# Altium PCB VCO_Placa.PcbDoc
Units mm, origin at the board's own origin, x right, y up, seen from the top; angles counter-clockwise.
Board outline 100 x 100 mm, 2 copper layers (Top Layer, Bottom Layer); 50 components, 37 nets, 140 pads, 16 vias.
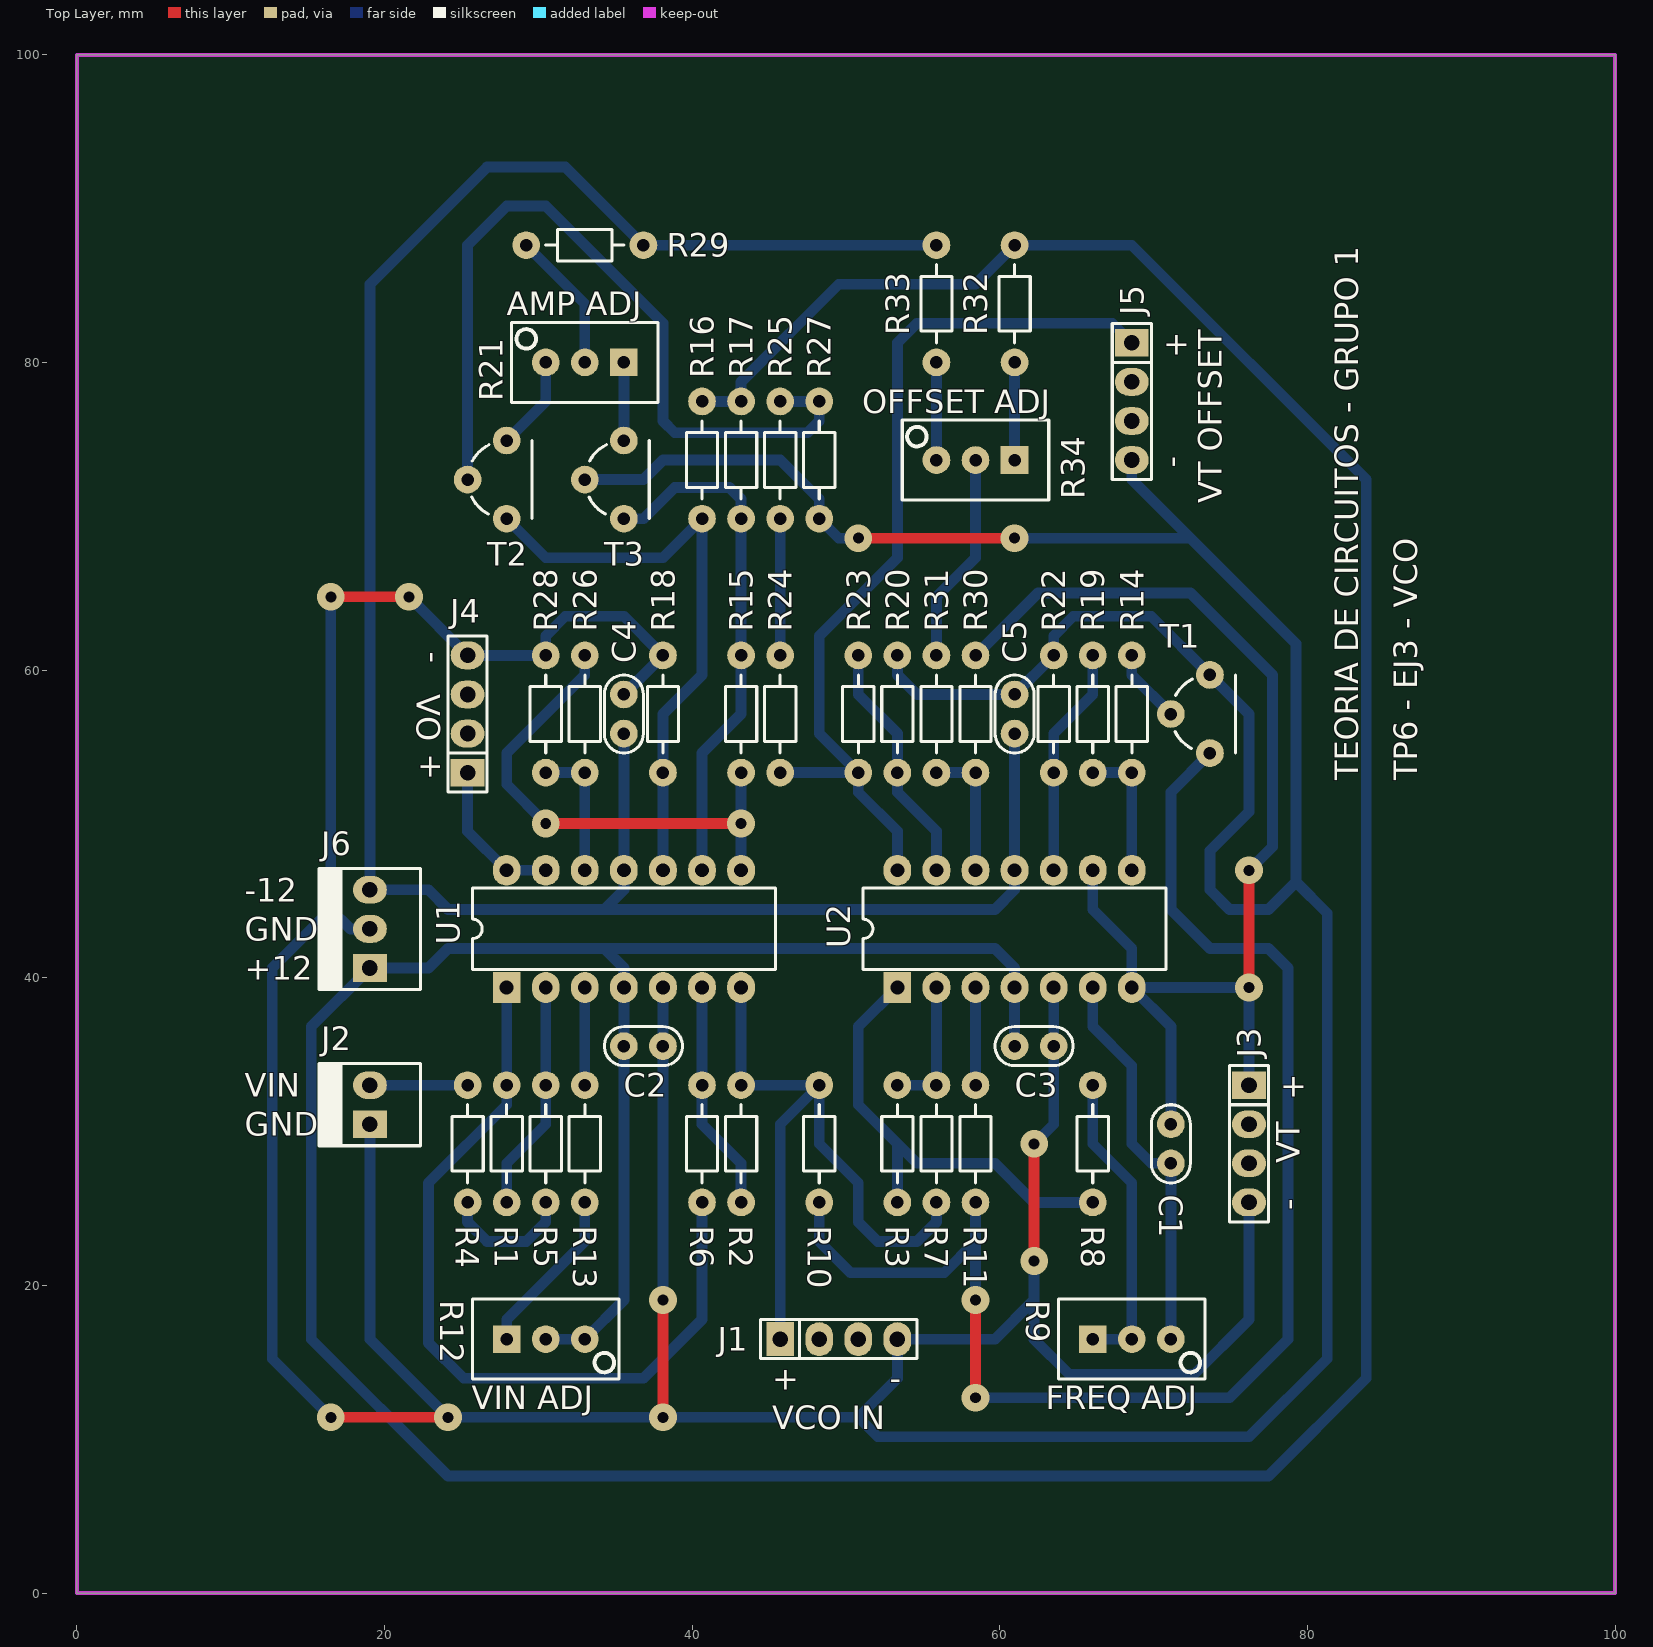
[diagram p0: Top Layer view]
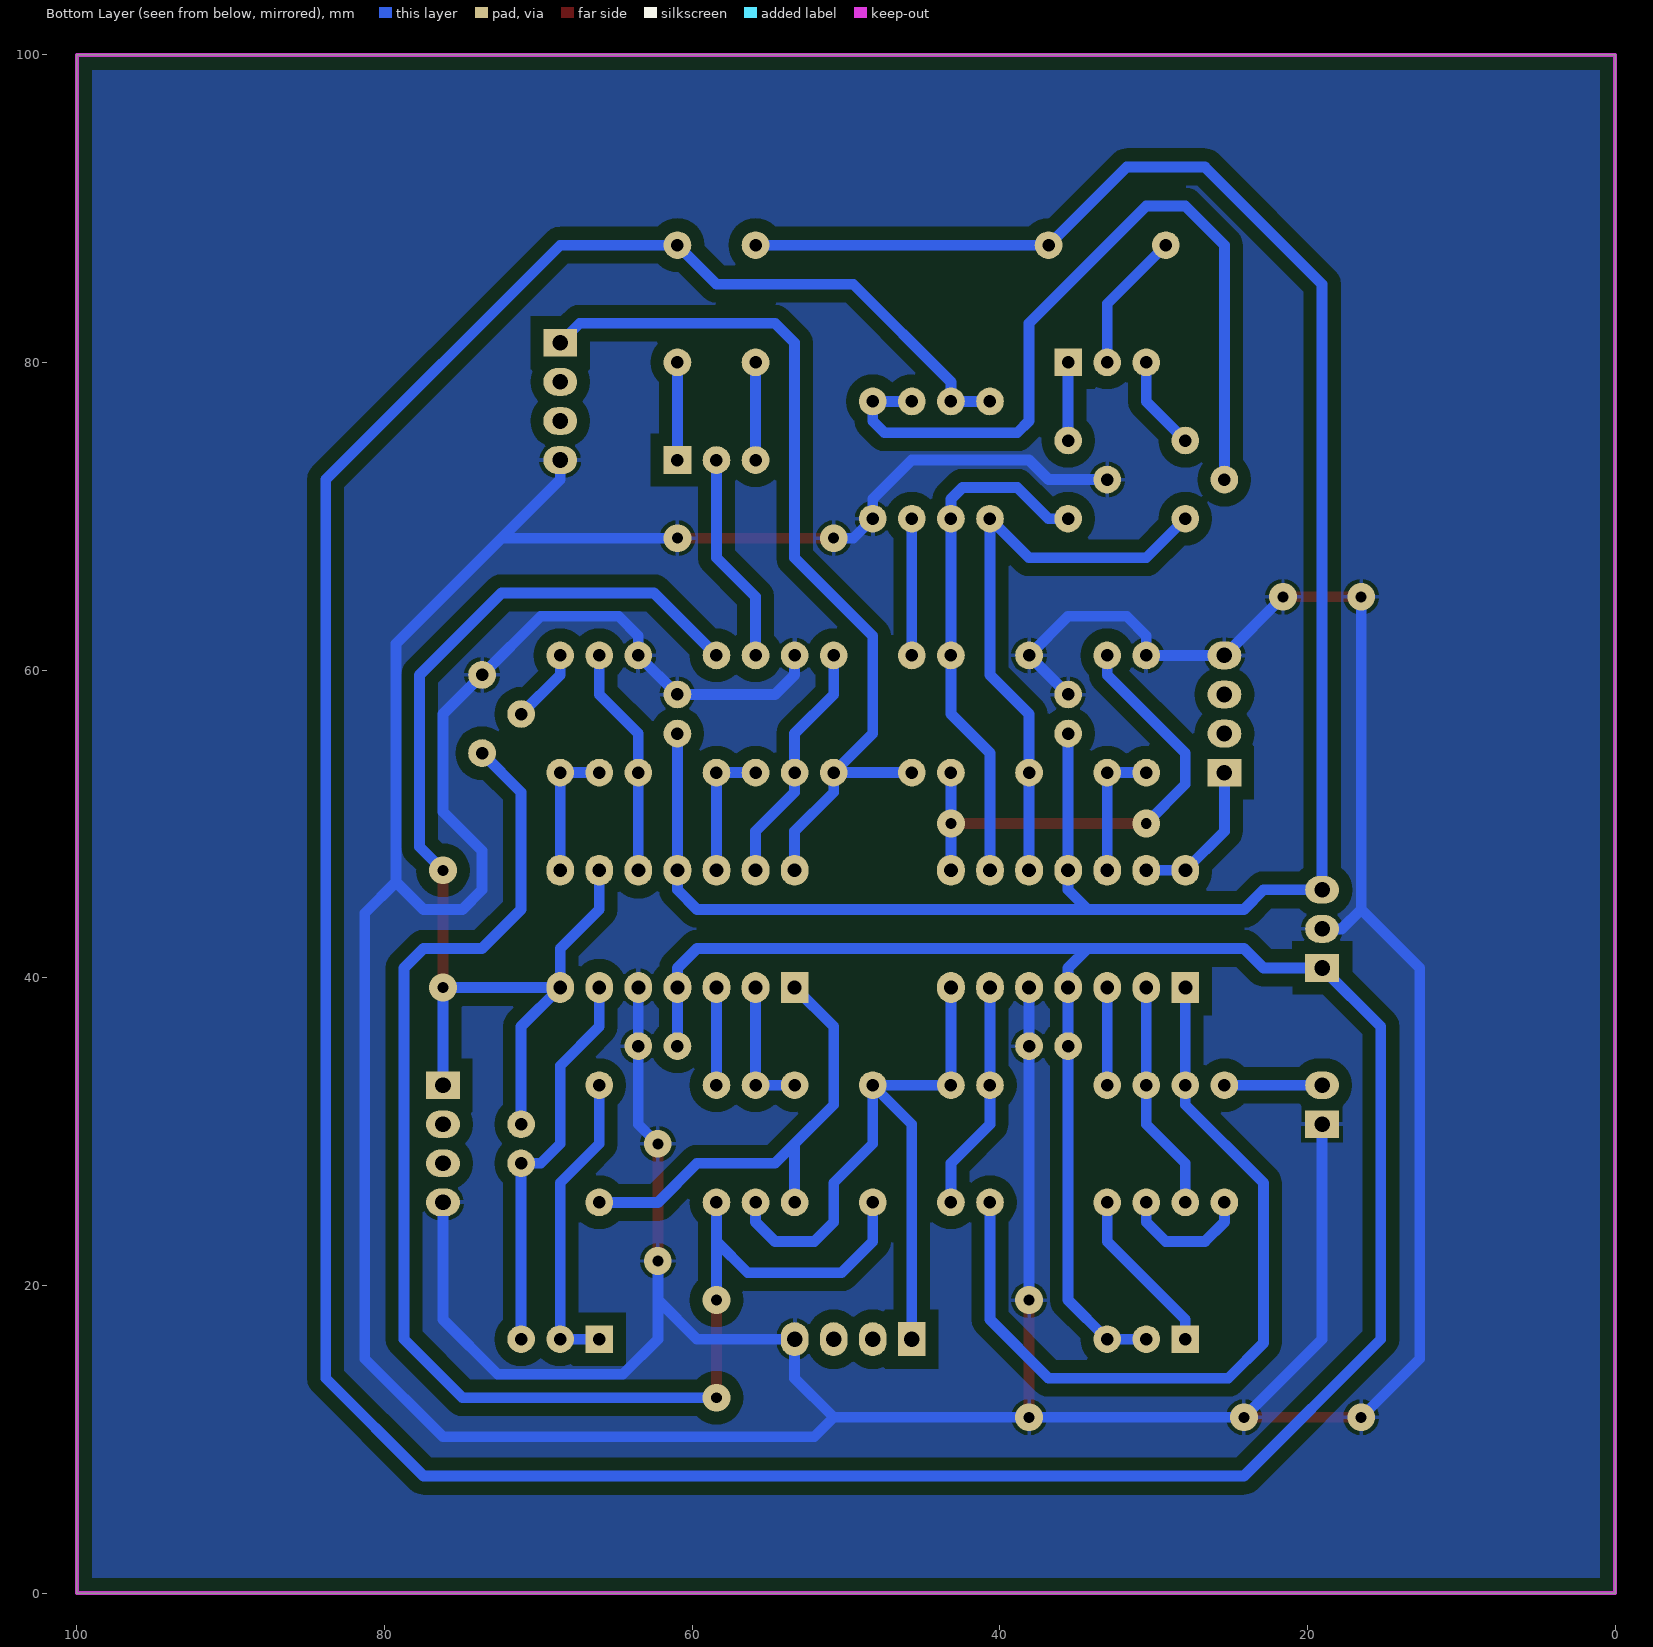
[diagram p1: Bottom Layer view, seen from below]
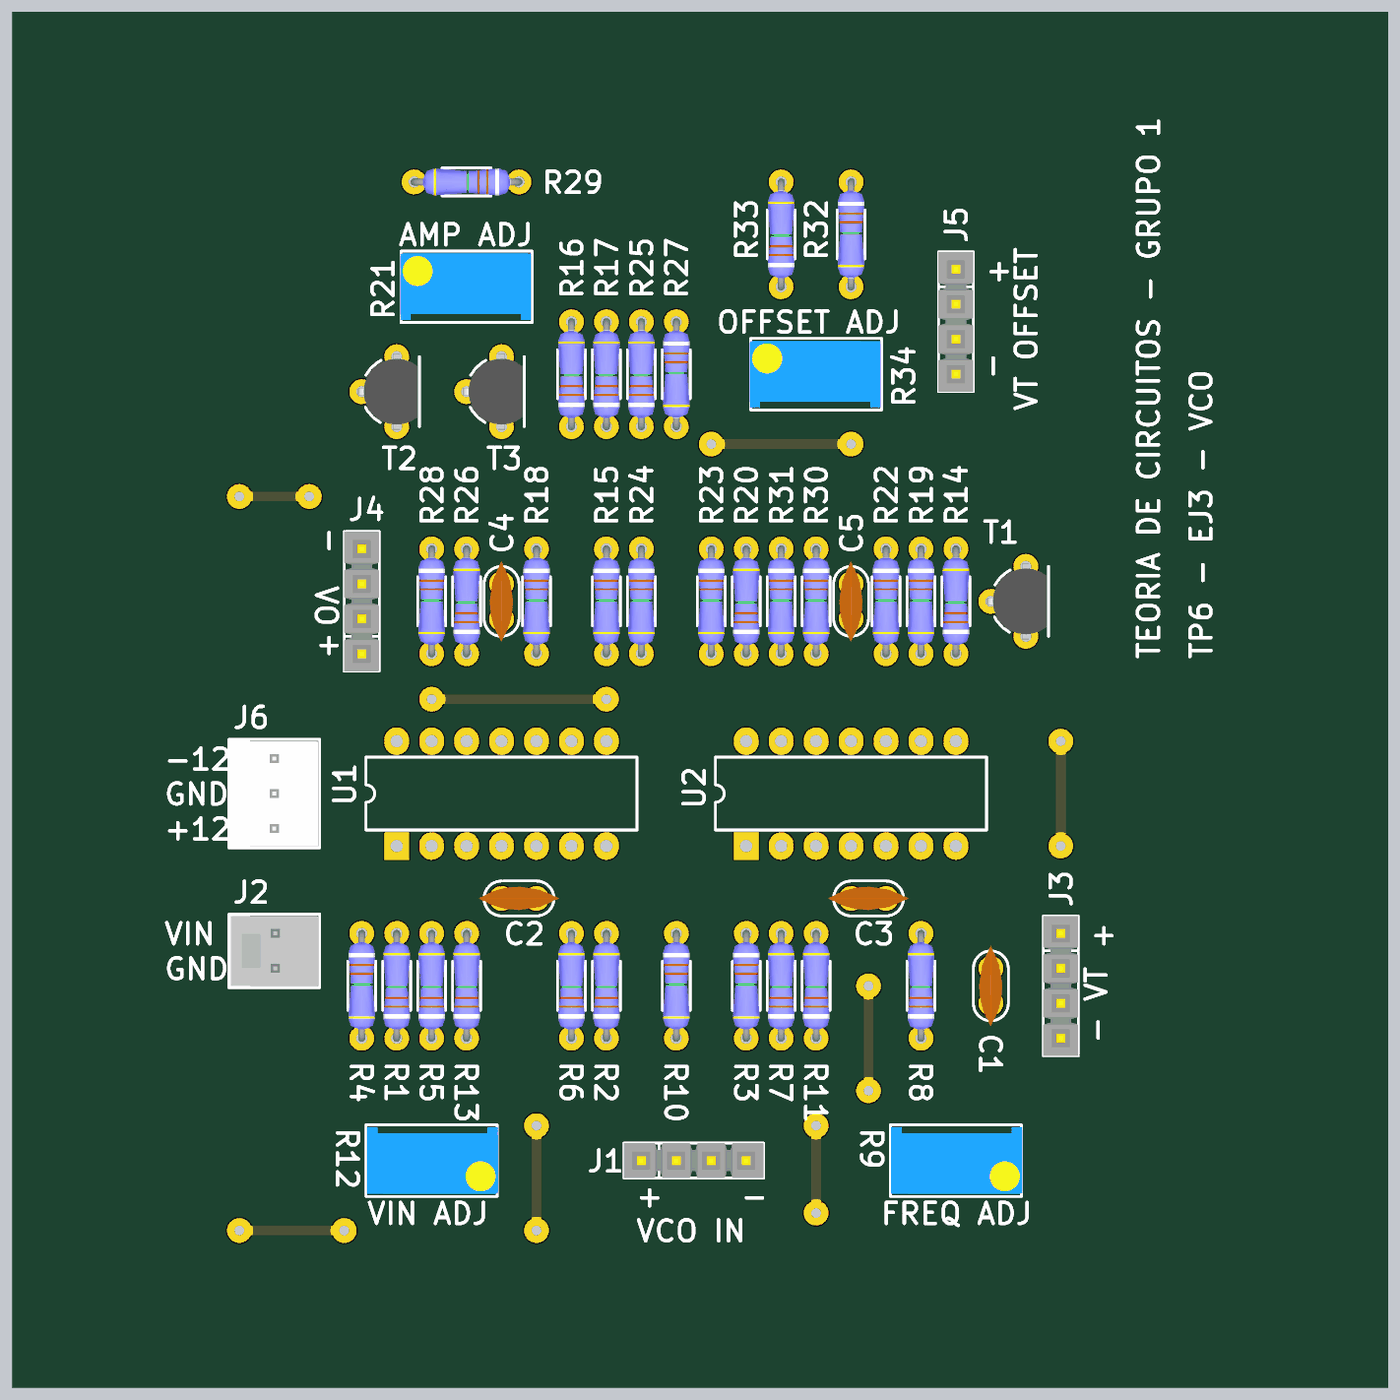
[diagram p2: 3D render of the assembled board from above, using the file's embedded part models]

## Layer stack, top to bottom
Top Solder: solder mask 0.0102, Solder Resist, Dk 3.5
Top Layer: signal copper 0.0356
Dielectric 1: dielectric 0.32, FR-4, Dk 4.8
Bottom Layer: signal copper 0.0356
Bottom Solder: solder mask 0.0102, Solder Resist, Dk 3.5

## Board outline
0,0 100,0 100,100 0,100

## Design rules (kind name [scope] priority, off if disabled: settings)
Clearance [All] p1: gap=0.7
PolygonConnect [All] p1: connectstyle=Relief reliefconductorwidth=0.254 reliefentries=4 polygonreliefangle="90 Angle" airgapwidth=0.254
RoutingVias [All] p1: holewidth=0.711 width=1.8 viastyle="Through Hole" minholewidth=0.711 minwidth=1.8 maxholewidth=0.711 maxwidth=1.8
SolderMaskExpansion [All] p1: expansion=0.102
Width [All] p1: maxlimit=0.7 minlimit=0.7 preferedwidth=0.7
30 further rules are at their usual default settings.

## Components (designator, comment, footprint, x,y, rotation, side; value= is the part's Value field where it differs from the comment)
C1 "10n" CAP100 71.12,29.21 r90 top
C2 "100n" CAP100 36.83,35.56 r0 top
C3 "100n" CAP100 62.23,35.56 r0 top
C4 "100n" CAP100 35.56,57.15 r90 top
C5 "100n" CAP100 60.96,57.15 r90 top
J1 "VIN" SIP4 49.53,16.51 r0 top
J2 "VIN" MOLEX2 19.05,30.48 r90 top
J3 "VT" SIP4 76.2,29.21 r270 top
J4 "VO" SIP4 25.4,57.15 r90 top
J5 "VT_OFFSET" SIP4 68.58,77.47 r270 top
J6 "FUENTE" MOLEX3 19.05,40.64 r90 top
R1 "1K8" RES300 27.94,25.4 r90 top
R2 "1K" RES300 43.18,25.4 r90 top
R3 "1K" RES300 53.34,33.02 r270 top
R4 "1K5" RES300 25.4,33.02 r270 top
R5 "1K" RES300 30.48,25.4 r90 top
R6 "1K" RES300 40.64,25.4 r90 top
R7 "1K" RES300 55.88,25.4 r90 top
R8 "1K8" RES300 66.04,25.4 r90 top
R9 "500" "PRESET V" 68.58,16.51 r0 top
R10 "1K" RES300 48.26,33.02 r270 top
R11 "1K" RES300 58.42,25.4 r90 top
R12 "10K" "PRESET V" 30.48,16.51 r0 top
R13 "47K" RES300 33.02,25.4 r90 top
R14 "2K2" RES300 68.58,53.34 r90 top
R15 "1K" RES300 43.18,60.96 r270 top
R16 "1K" RES300 40.64,69.85 r90 top
R17 "1K" RES300 43.18,69.85 r90 top
R18 "1K" RES300 38.1,60.96 r270 top
R19 "1K" RES300 66.04,60.96 r270 top
R20 "1K" RES300 53.34,53.34 r90 top
R21 "50" "PRESET V" 33.02,80.01 r180 top
R22 "1K" RES300 63.5,60.96 r270 top
R23 "1K" RES300 50.8,60.96 r270 top
R24 "22K" RES300 45.72,60.96 r270 top
R25 "22K" RES300 45.72,69.85 r90 top
R26 "1K" RES300 33.02,53.34 r90 top
R27 "1K" RES300 48.26,77.47 r270 top
R28 "1K" RES300 30.48,60.96 r270 top
R29 "5K6" RES300 36.83,87.63 r180 top
R30 "100K" RES300 58.42,60.96 r270 top
R31 "100K" RES300 55.88,60.96 r270 top
R32 "1K" RES300 60.96,87.63 r270 top
R33 "1K" RES300 55.88,80.01 r90 top
R34 "1K" "PRESET V" 58.42,73.66 r180 top
T1 "BC548B" TO92 72.39,57.15 r270 top
T2 "BC337" TO92 26.67,72.39 r270 top
T3 "BC337" TO92 34.29,72.39 r270 top
U1 "TL084ACN" 646-06 35.56,43.18 r0 top
U2 "TL084ACN" 646-06 60.96,43.18 r0 top

## Footprints (in the part's own frame and the unit in brackets; to place one, negate y for a bottom-side part, rotate by r counter-clockwise, add the part's x,y. Pads: shape width x height; smd on the part's side, far side on the other; paste and mask are expansions set on the pad)
646-06 [mm] "DIP; 14 Leads; Row Spacing 7.62 mm; Pitch 2.54 mm"
  rect 1.8x2 hole 0.9: 1(-7.62,-3.81)
  oval 1.8x2 hole 0.9: 2(-5.08,-3.81) 3(-2.54,-3.81) 4(0,-3.81) 5(2.54,-3.81) 6(5.08,-3.81) 7(7.62,-3.81) 8(7.62,3.81) 9(5.08,3.81) 10(2.54,3.81) 11(0,3.81) 12(-2.54,3.81) 13(-5.08,3.81) 14(-7.62,3.81)
  silkscreen extent -9.85,-2.65 9.85,2.65
CAP100 [mm]
  round 1.8 hole 0.813: 1(-1.27,0) 2(1.27,0)
  silkscreen extent -2.54,-1.27 2.54,1.27, body extent -2.92,-0.84 2.92,0.86, height 6.12
MOLEX2 [mm]
  rect 1.8x2.2 hole 1.016: 1(0,0)
  oval 1.8x2.2 hole 1.016: 2(2.54,0)
  silkscreen extent -1.4,-3.3 3.94,3.3, body extent -1.27,-3.17 3.81,3.18, height 10.74
MOLEX3 [mm]
  rect 1.8x2.2 hole 1.016: 1(0,0)
  oval 1.8x2.2 hole 1.016: 2(2.54,0) 3(5.08,0)
  silkscreen extent -1.4,-3.3 6.48,3.3, body extent -1.27,-3.17 6.35,3.18, height 10.74
"PRESET V" [mm]
  rect 1.8x1.8 hole 0.813: 1(-2.54,0)
  round 1.8 hole 0.813: 2(0,0) 3(2.54,0)
  silkscreen extent -4.76,-2.6 4.76,2.6, body extent -4.7,-2.42 4.83,2.42, height 11.55
RES300 [mm]
  round 1.8 hole 0.813: 1(0,0) 2(7.62,0)
  silkscreen extent 1.27,-1.02 6.35,1.02, body extent -0.25,-0.97 7.87,0.97, height 2.01
SIP4 [mm]
  rect 1.8x2.2 hole 1.016: 1(-3.81,0)
  oval 1.8x2.2 hole 1.016: 2(-1.27,0) 3(1.27,0) 4(3.81,0)
  silkscreen extent -5.08,-1.27 5.08,1.27, body extent -5.08,-1.27 5.08,1.27, height 8.38
TO92 [mm]
  round 1.8 hole 0.813: 1(0,-1.27) 2(2.54,1.27) 3(-2.54,1.27)
  silkscreen extent -2.54,-1 2.54,2.92, body extent -2.79,-1.55 2.79,2.79, height 8

## Part data
C1 C2 C3 C4 C5: library part CAP
J1 J3 J4 J5: library part CON4
J2: library part MOLEX2
J6: library part MOLEX3
R1 R2 R3 R4 R5 R6 R7 R8 R10 R11 R13 R14 R15 R16 R17 R18 R19 R20 R22 R23 R24 R25 R26 R27 R28 R29 R30 R31 R32 R33: library part RES
R9 R12 R21 R34: library part PRESET
T1 T2 T3: library part "TRANSISTOR NPN"
U1 U2: "JFET-Input Operational Amplifier"

## Via types
v1: diameter 1.8, hole 0.711, Top Layer to Bottom Layer, 16 vias

## Nets (pads, with @x,y where several pads share a name; then routed paths per layer and width w, separated by ;. In a path a pad name is that pad's centre, name@x,y a point inside that pad or via, vN(x,y) a via of type N, cw(c..) or ccw(c..) an arc to the next point about the centre after c; other vN are vias at no path point)
+12V: C2.1 C3.1 J6.1 R12.2 R12.3 R16.2 R17.2 R32.1 U1.4 U2.4 | length 291
  Bottom Layer w0.7: R12.2 R12.3 35.56,19.05 C2.1 U1.4 35.56,40.64 34.29,41.91 ; R16.2 R17.2 43.18,78.74 49.53,85.09 58.42,85.09 R32.1 68.58,87.63 83.82,72.39 83.82,13.97 77.47,7.62 24.13,7.62 15.24,16.51 15.24,36.83 J6.1 22.86,40.64 24.13,41.91 34.29,41.91 ; C3.1 U2.4 60.96,40.64 59.69,41.91 34.29,41.91
-12V: C4.1 C5.1 J6.3 R29.1 R33.2 U1.11 U2.11 | length 146.5
  Bottom Layer w0.7: C4.1 U1.11 35.56,45.72 34.29,44.45 ; R33.2 R29.1 31.75,92.71 26.67,92.71 19.05,85.09 J6.3 22.86,45.72 24.13,44.45 34.29,44.45 ; C5.1 U2.11 60.96,45.72 59.69,44.45 34.29,44.45
GND: C2.2 C3.2 C4.2 C5.2 J1.4 J2.1 J3.4 J4.4 J5.4 J6.2 R18.1 R20.2 R22.1 R27.2 R28.1 T1.3 T3.1 U1.5 U2.5 | length 425
  Top Layer w0.7: v1(16.51,11.43) v1(24.13,11.43) ; v1(16.51,64.77) v1(21.59,64.77) ; v1(38.1,11.43) v1(38.1,19.05) ; v1(50.8,68.58) v1(60.96,68.58) ; v1(62.23,21.59) v1(62.23,29.21)
  Bottom Layer w0.7: v1(16.51,11.43) 12.7,15.24 12.7,40.64 16.51,44.45 ; v1(16.51,64.77) 16.51,44.45 ; J2.1 19.05,16.51 v1(24.13,11.43) v1(38.1,11.43) 50.8,11.43 ; J6.2 17.78,43.18 16.51,44.45 ; v1(21.59,64.77) J4.4 R28.1 30.48,62.23 31.75,63.5 35.56,63.5 R18.1 C4.2 ; T3.1 36.83,72.39 38.1,73.66 45.72,73.66 48.26,71.12 R27.2 49.53,68.58 v1(50.8,68.58) ; v1(38.1,19.05) C2.2 U1.5 ; R20.2 53.34,59.69 54.61,58.42 C5.2 R22.1 63.5,62.23 64.77,63.5 69.85,63.5 T1.3 76.2,57.15 76.2,50.8 73.66,48.26 73.66,45.72 74.93,44.45 77.47,44.45 79.248,46.228 ; v1(60.96,68.58) 72.39,68.58 ; v1(62.23,21.59) 62.23,19.05 ; v1(62.23,29.21) 63.5,30.48 C3.2 U2.5 ; J5.4 68.58,72.39 72.39,68.58 ; J3.4 76.2,17.78 72.644,14.224 64.516,14.224 62.23,16.51 62.23,19.05 ; 50.8,11.43 52.07,10.16 76.2,10.16 81.28,15.24 81.28,44.196 79.248,46.228 ; 50.8,11.43 53.34,13.97 J1.4 59.69,16.51 62.23,19.05 ; 72.39,68.58 79.248,61.722 79.248,46.228
NetC1_1: C1.1 R9.3 U2.6 | length 25.7
  Bottom Layer w0.7: U2.6 66.04,36.83 68.58,34.29 68.58,29.21 69.85,27.94 C1.1 R9.3
NetJ1_1: J1.1 R2.2 R7.1 R10.1 U1.7 | length 46.3
  Bottom Layer w0.7: U1.7 R2.2 R10.1 ; J1.1 45.72,30.48 R10.1 ; R7.1 55.88,24.13 54.61,22.86 52.07,22.86 50.8,24.13 50.8,26.67 48.26,29.21 R10.1
NetJ2_2: J2.2 R4.1 | length 6.3
  Bottom Layer w0.7: J2.2 R4.1
NetJ4_1: J4.1 U1.13 U1.14 | length 9.9
  Bottom Layer w0.7: J4.1 25.4,49.53 U1.14 U1.13
NetJ5_1: J5.1 R23.2 R24.2 U2.14 | length 59.9
  Bottom Layer w0.7: R24.2 R23.2 ; U2.14 53.34,49.53 50.8,52.07 R23.2 ; J5.1 67.31,82.55 54.61,82.55 53.34,81.28 53.34,67.31 48.26,62.23 48.26,55.88 R23.2
NetR1_1: R1.1 R5.2 U1.2 | length 15
  Bottom Layer w0.7: R1.1 27.94,27.94 30.48,30.48 R5.2 U1.2
NetR1_2: R1.2 R6.1 U1.1 | length 53.1
  Bottom Layer w0.7: U1.1 R1.2 27.94,31.75 22.86,26.67 22.86,16.256 25.146,13.97 36.83,13.97 40.64,17.78 R6.1
NetR2_1: R2.1 R6.2 U1.6 | length 15
  Bottom Layer w0.7: U1.6 R6.2 40.64,30.48 43.18,27.94 R2.1
NetR3_1: R3.1 R7.2 U2.2 | length 8.9
  Bottom Layer w0.7: R3.1 R7.2 U2.2
NetR3_2: R3.2 R8.1 U2.1 | length 30.4
  Bottom Layer w0.7: R3.2 53.34,29.21 ; U2.1 50.8,36.83 50.8,31.75 53.34,29.21 ; R8.1 62.23,25.4 59.69,27.94 54.61,27.94 53.34,29.21
NetR4_2: R4.2 R5.1 | length 8.7
  Bottom Layer w0.7: R4.2 25.4,24.13 26.67,22.86 29.21,22.86 30.48,24.13 R5.1
NetR8_2: R8.2 R9.1 R9.2 | length 20.1
  Bottom Layer w0.7: R9.1 R9.2 68.58,26.67 66.04,29.21 R8.2
NetR10_2: R10.2 R11.1 T1.2 | length 93.5
  Top Layer w0.7: v1(58.42,12.7) v1(58.42,19.05)
  Bottom Layer w0.7: R10.2 48.26,22.86 50.292,20.828 56.388,20.828 58.42,22.86 ; v1(58.42,12.7) 74.93,12.7 78.74,16.51 78.74,40.64 77.47,41.91 73.66,41.91 71.12,44.45 71.12,52.07 T1.2 ; v1(58.42,19.05) 58.42,22.86 ; R11.1 58.42,22.86
NetR11_2: R11.2 U2.3 | length 6.3
  Bottom Layer w0.7: R11.2 U2.3
NetR12_1: R12.1 R13.1 | length 11
  Bottom Layer w0.7: R12.1 27.94,17.78 33.02,22.86 R13.1
NetR13_2: R13.2 U1.3 | length 6.3
  Bottom Layer w0.7: R13.2 U1.3
NetR14_1: R14.1 R19.2 U2.8 | length 8.9
  Bottom Layer w0.7: R19.2 R14.1 U2.8
NetR14_2: R14.2 T1.1 | length 4.9
  Bottom Layer w0.7: R14.2 68.58,59.69 T1.1
NetR15_1: R15.1 R17.1 T3.2 U1.9 | length 34
  Bottom Layer w0.7: T3.2 36.83,69.85 38.862,71.882 42.418,71.882 43.18,71.12 R17.1 R15.1 43.18,57.15 40.64,54.61 U1.9
NetR15_2: R15.2 R26.2 U1.8 | length 33.1
  Top Layer w0.7: v1(30.48,50.038) v1(43.18,50.038)
  Bottom Layer w0.7: v1(30.48,50.038) 27.94,52.578 27.94,54.61 33.02,59.69 R26.2 ; U1.8 v1(43.18,50.038) R15.2
NetR16_1: R16.1 R18.2 T2.2 U1.10 | length 38.7
  Bottom Layer w0.7: T2.2 30.48,67.31 38.1,67.31 R16.1 40.64,59.69 38.1,57.15 R18.2 U1.10
NetR19_1: R19.1 R22.2 U2.10 | length 15
  Bottom Layer w0.7: U2.10 R22.2 63.5,55.88 66.04,58.42 R19.1
NetR20_1: R20.1 R23.1 U2.13 | length 16.1
  Bottom Layer w0.7: R23.1 50.8,58.42 53.34,55.88 R20.1 53.34,52.07 55.88,49.53 U2.13
NetR21_1: R21.1 T3.3 | length 5.1
  Bottom Layer w0.7: T3.3 R21.1
NetR21_2: R21.2 R29.2 | length 9.2
  Bottom Layer w0.7: R29.2 33.02,83.82 R21.2
NetR21_3: R21.3 T2.3 | length 6.1
  Bottom Layer w0.7: T2.3 30.48,77.47 R21.3
NetR24_1: R24.1 R25.1 | length 8.9
  Bottom Layer w0.7: R24.1 R25.1
NetR25_2: R25.2 R27.1 T2.1 | length 53.1
  Bottom Layer w0.7: T2.1 25.4,87.63 27.94,90.17 30.48,90.17 38.1,82.55 38.1,76.2 38.862,75.438 47.498,75.438 48.26,76.2 R27.1 R25.2
NetR26_1: R26.1 R28.2 U1.12 | length 8.9
  Bottom Layer w0.7: R28.2 R26.1 U1.12
NetR30_2: R30.2 R31.2 U2.12 | length 8.9
  Bottom Layer w0.7: R31.2 R30.2 U2.12
NetR31_1: R31.1 R34.2 | length 13.8
  Bottom Layer w0.7: R31.1 55.88,64.77 58.42,67.31 R34.2
NetR32_2: R32.2 R34.1 | length 6.3
  Bottom Layer w0.7: R34.1 R32.2
NetR33_1: R33.1 R34.3 | length 6.3
  Bottom Layer w0.7: R34.3 R33.1
VT: C1.2 J3.1 R30.1 U2.7 U2.9 | length 76.7
  Top Layer w0.7: v1(76.2,39.37) v1(76.2,46.99)
  Bottom Layer w0.7: R30.1 62.484,65.024 72.39,65.024 77.724,59.69 77.724,48.514 v1(76.2,46.99) ; U2.9 66.04,44.45 68.58,41.91 U2.7 ; C1.2 71.12,36.83 U2.7 ; J3.1 v1(76.2,39.37) U2.7
pads on no net: J1.2 J1.3 J3.2 J3.3 J4.2 J4.3 J5.2 J5.3

## Polygon pours and split planes (outlines as drawn)
GND on Bottom Layer "Top Overlay-No Net" (solid, remove dead copper, pour order 3): 0,100 100,100 100,0 0,0

## Keep-outs
Keep-Out Layer:
  the board outline again, w0.254

## Silkscreen, mask and mechanical layers (free items; w line width, h text height)
Top Overlay:
  text "AMP ADJ" at 27.94,83.058 h1.52
  text "+" at 70.612,80.518 h1.52
  text "OFFSET ADJ" at 51.054,76.708 h1.52
  text "-" at 71.882,73.152 h1.52 r90
  text "VT OFFSET" at 74.422,70.866 h1.52 r90
  text "-" at 23.622,60.452 h1.52 r90
  text "VO" at 22.098,58.42 h1.52 r270
  text "+" at 23.622,52.832 h1.52 r90
  text "TEORIA DE CIRCUITOS - GRUPO 1" at 83.312,52.832 h1.52 r90
  text "TP6 - EJ3 - VCO" at 87.122,52.832 h1.52 r90
  text "-12" at 10.922,44.958 h1.52
  text "GND" at 10.922,42.418 h1.52
  text "+12" at 10.922,39.878 h1.52
  text "VIN" at 10.922,32.258 h1.52
  text "+" at 78.232,32.258 h1.52
  text "GND" at 10.922,29.718 h1.52
  text "VT" at 79.502,27.94 h1.52 r90
  text "-" at 79.502,24.892 h1.52 r90
  text "+" at 45.212,13.208 h1.52
  text "-" at 52.832,13.208 h1.52
  text "VIN ADJ" at 25.654,11.938 h1.52
  text "FREQ ADJ" at 62.992,11.938 h1.52
  text "VCO IN" at 45.212,10.668 h1.52